# Altium PCB Flyback SMPS.PcbDoc
Units mm, origin at the board's own origin, x right, y up, seen from the top; angles counter-clockwise.
Board outline 76 x 51.5 mm, 2 copper layers (Top Layer, Bottom Layer), stack 1.6 mm thick; 28 components, 19 nets, 79 pads, 10 vias.
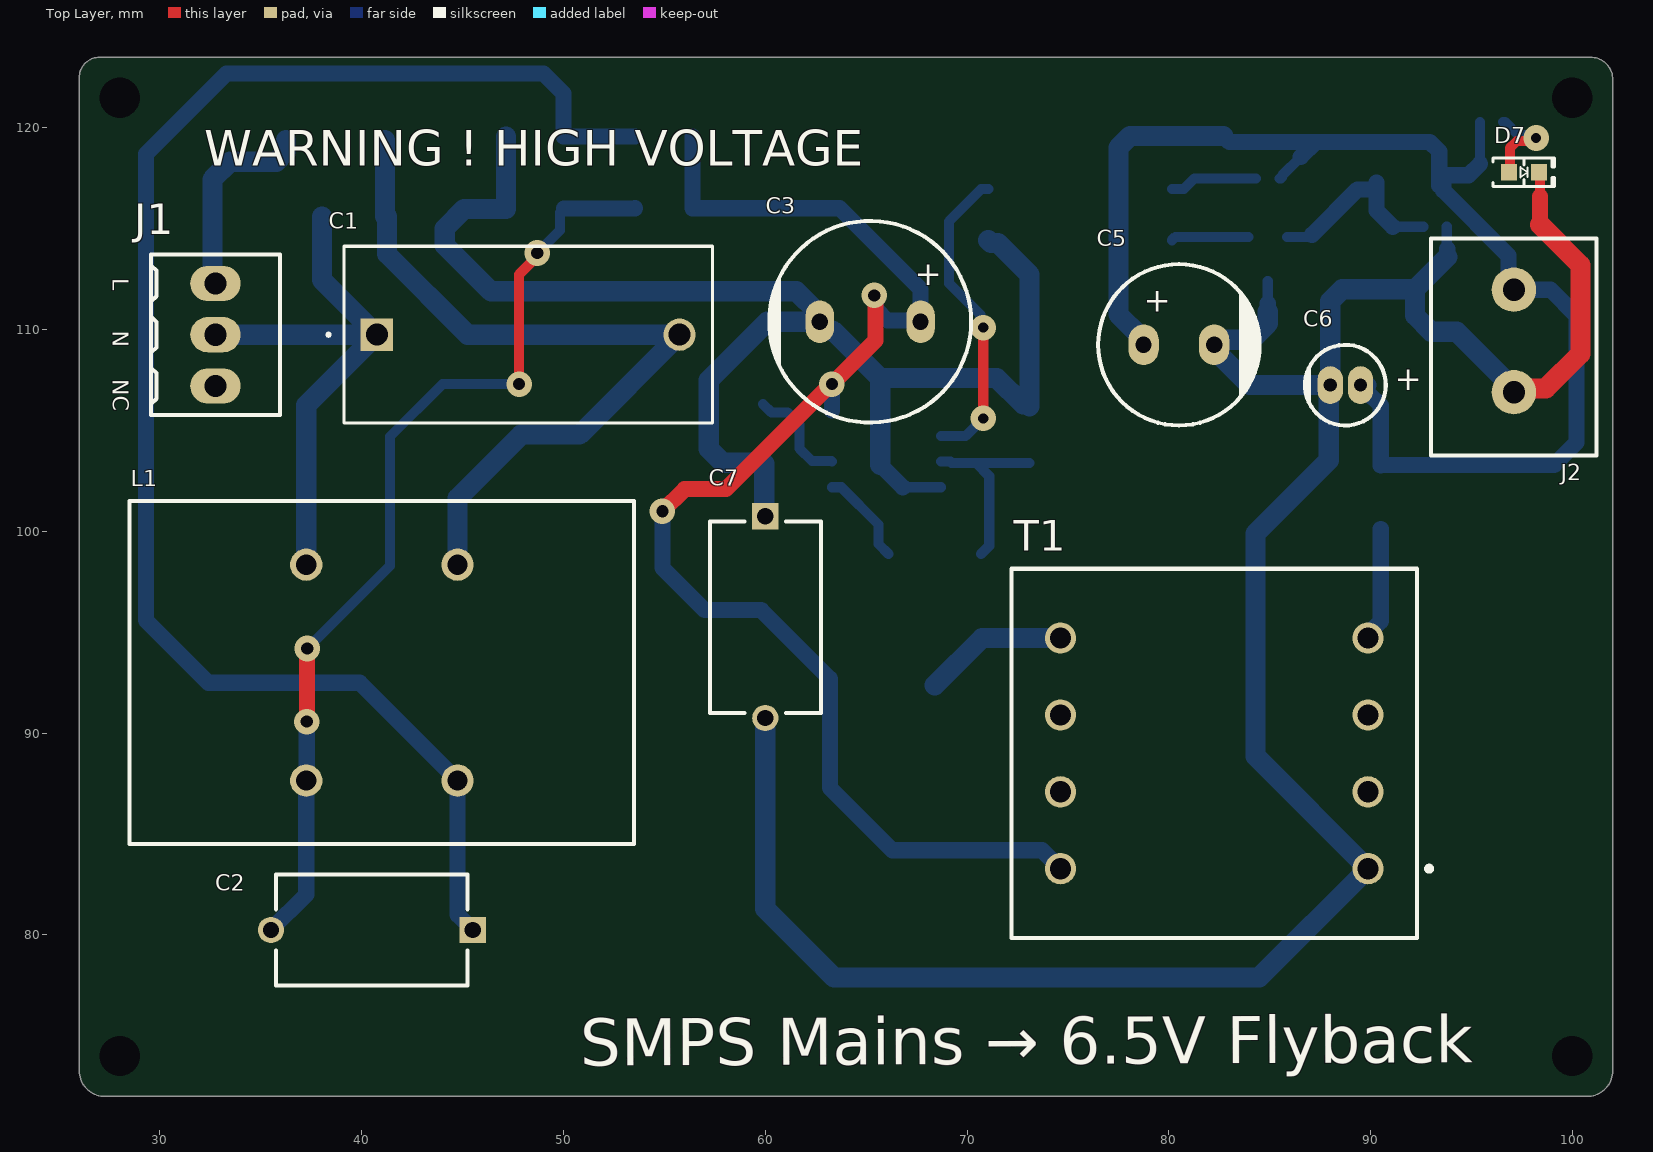
[diagram p0: Top Layer view]
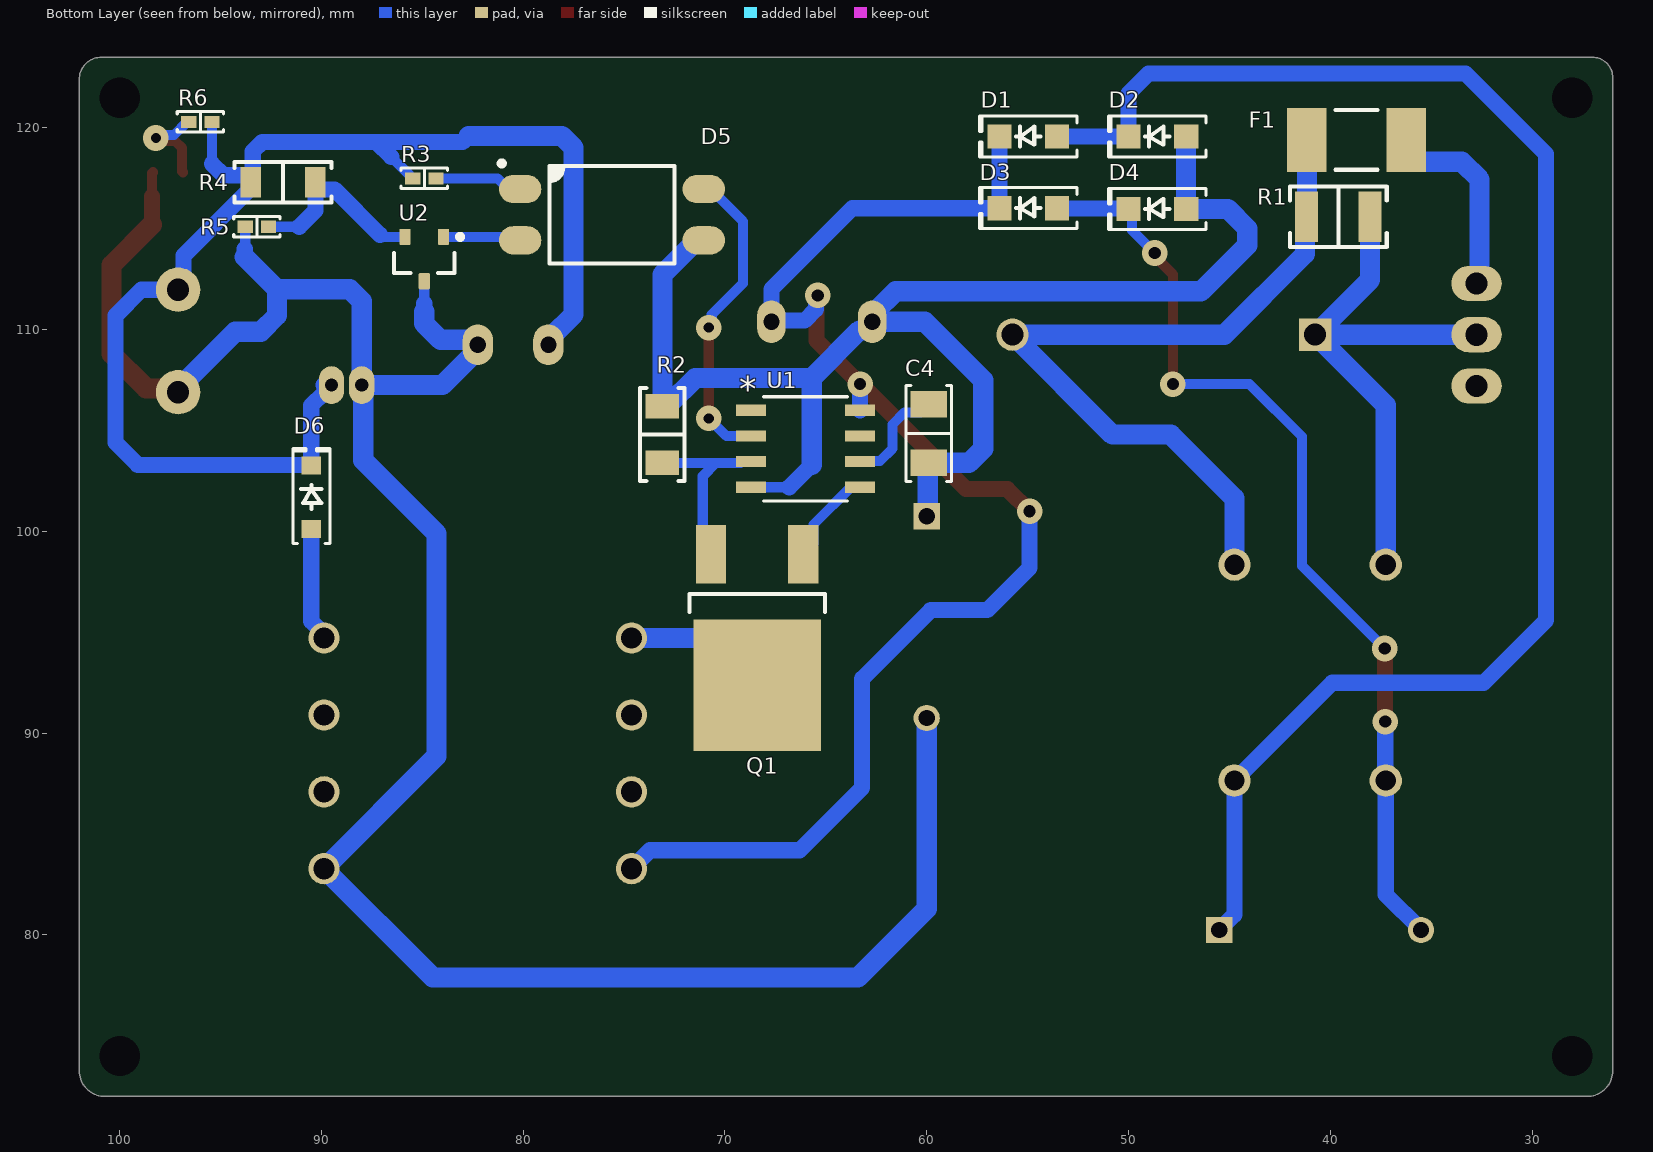
[diagram p1: Bottom Layer view, seen from below]

## Layer stack, top to bottom
Top Solder: solder mask 0.0203, Solder Resist, Dk 3.5
Top Layer: signal copper 0.0508
Dielectric 1: dielectric 1.4986, FR-4, Dk 4.8
Bottom Layer: signal copper 0.0508
Bottom Solder: solder mask 0.0203, Solder Resist, Dk 3.5

## Board outline
26,73.27 26,122.5 cw(c27,122.5) 27,123.5 100.9,123.5 cw(c100.9,122.4) 102,122.4 102,73.27 cw(c100.73,73.27) 100.73,72 27.27,72 cw(c27.27,73.27)

## Design rules (kind name [scope] priority, off if disabled: settings)
BoardOutlineClearance [All] p1: gap=0.2 ignorepadtopadclearanceinfootprint=FALSE
Clearance [All] p1: gap=0.127 ignorepadtopadclearanceinfootprint=TRUE except(0.254: Arc-Hole Track-Hole SMDPad-Hole THPad-Hole Via-Hole Fill-Hole Poly-Hole Region-Hole Text-Hole)
ComponentClearance [All] p1: gap=0.127 collisioncheckmode=3 verticalgap=0.127 showdistances=TRUE
DiffPairsRouting [All] p1: maxlimit=0.254 minlimit=0.127 mostfreqgap=0.127 toplayer_minwidth=0.127 toplayer_maxwidth=25.4 toplayer_prefwidth=0.127 bottomlayer_minwidth=0.127 bottomlayer_maxwidth=25.4 bottomlayer_prefwidth=0.127 maxuncoupledlength=12.7
Height [All] p1: minheight=0 maxheight=1816.048 prefheight=12.7
HoleSize [All] p1: absolutevalues=TRUE maxlimit=6.3 minlimit=0.3 maxpercent=80.000 minpercent=20.000
HoleToHoleClearance [All] p1: gap=0.254 allowstackedmicrovias=FALSE
MinimumAnnularRing [All] p1: minimumring=0.152
MinimumSolderMaskSliver [All] p1: minsoldermaskwidth=0.152
PlaneClearance [All] p1: clearance=0.127
PlaneConnect PlaneConnectPowerPads [InPadClass('PowerPads')] p1: planeconnectstyle=Direct reliefexpansion=0.508 reliefentries=4 reliefconductorwidth=0.254 reliefairgap=0.254
PlaneConnect [All] p2: pad.planeconnectstyle=Relief pad.reliefexpansion=0.3 pad.reliefentries=4 pad.reliefconductorwidth=0.127 pad.reliefairgap=0.127 via.planeconnectstyle=Direct via.reliefexpansion=0.3 via.reliefentries=4 via.reliefconductorwidth=0.127 via.reliefairgap=0.127
PolygonConnect PolygonConnectPowerPads [All vs (InPadClass('PowerPads'))] p1: connectstyle=Direct reliefconductorwidth=0.254 reliefentries=4 polygonreliefangle="90 Angle" airgapwidth=0.254
PolygonConnect [All] p2: thpad.connectstyle=Relief thpad.reliefconductorwidth=0.127 thpad.reliefentries=4 thpad.polygonreliefangle="90 Angle" thpad.airgapwidth=0.127 smdpad.connectstyle=Relief smdpad.reliefconductorwidth=0.127 smdpad.reliefentries=4 smdpad.polygonreliefangle="90 Angle" smdpad.airgapwidth=0.127 via.connectstyle=Direct via.reliefconductorwidth=0.127 via.reliefentries=4 via.polygonreliefangle="90 Angle" via.airgapwidth=0.127
RoutingVias [All] p1: holewidth=0.3 width=0.6 viastyle="Through Hole" minholewidth=0.3 minwidth=0.6 maxholewidth=0.6 maxwidth=6.6
SilkToSilkClearance [All] p1: silktosilkclearance=0.127
SilkToSolderMaskClearance [IsPad] p1: minsilkscreentomaskgap=0.127 clearancetoexposedcopper=TRUE
SolderMaskExpansion [All] p1: expansion=0.051 istentingtop=FALSE
SupplyNets "Schematic Supply Nets_4" [InNet('N')] p1: voltage=0.000
SupplyNets "Schematic Supply Nets_3" [InNet('GND')] p2: voltage=0.000
SupplyNets "Schematic Supply Nets_2" [InNet('GND_SEC')] p3: voltage=0.000
SupplyNets "Schematic Supply Nets_1" [InNet('L')] p4: voltage=0.000
SupplyNets "Schematic Supply Nets" [InNet('+6.5V')] p5: voltage=0.000
UnRoutedNet [All] p1: checkbadconnections=TRUE
Width Width_10mil [All] p1: maxlimit=25.4 minlimit=0.254 preferedwidth=0.254 minimp=50.000000 maximp=50.000000 favimp=50.000000
Width Width_6mil [All] p2: maxlimit=25.4 minlimit=0.152 preferedwidth=0.152 minimp=50.000000 maximp=50.000000 favimp=50.000000
Width Power_20mil [All] p3: maxlimit=25.4 minlimit=0.508 preferedwidth=0.508 minimp=50.000000 maximp=50.000000 favimp=50.000000
Width Power_12mil [All] p4: maxlimit=25.4 minlimit=0.305 preferedwidth=0.305 minimp=50.000000 maximp=50.000000 favimp=50.000000
Width Width_5mil [All] p5: maxlimit=25.4 minlimit=0.127 preferedwidth=0.127 minimp=50.000000 maximp=50.000000 favimp=50.000000
19 further rules are at their usual default settings.

## Components (designator, comment, footprint, x,y, rotation, side; value= is the part's Value field where it differs from the comment)
C1 "100nF" CAP_B32652A--15--8.5x14.5x18_TDK 40.75,109.75 r0 top
C2 "YCAP" Vishay_0_MFG 40.5,80.25 r180 top value=2.2nF
C3 "10uF 400V" "CAP TH ALUM ELEC D10.00mm S5.00mm H17.50mm" 65.2,110.392 r0 top value=10µF
C4 "10µF" "CAP 1206_3216 - 1.8MM" 59.9,104.85 r270 bottom
C5 "470 µF" "CAP AL TH D8 L3.5 H12.5" 80.5,109.25 r0 top
C6 "4.7µF" "CAP TH ALUM ELEC D4.00mm S1.50mm H6.00mm" 88.75,107.25 r0 top
C7 "YCAP" Vishay_0_MFG 60,95.75 r270 top value=2.2nF
D1 "1N4007" SOD123F 54.97,119.566 r0 bottom
D2 "1N4007" SOD123F 48.572,119.566 r0 bottom
D3 "1N4007" SOD123F 54.97,116.019 r0 bottom
D4 "1N4007" SOD123F 48.572,115.984 r0 bottom
D5 "LTV-817S-TA1" "LITEON LTV-817" 75.6,115.7 r180 bottom
D6 "1N5819" SOD-123 90.5,101.7 r90 bottom
D7 "Green" "LED 0603_1608 GREEN" 97.6,117.8 r0 top
F1 "0679H2000-05" "FUSE 2410_6125 2" 38.7,119.4 r0 bottom
J1 "Part Number" "TE 282834-3" 32.75,109.75 r90 top
J2 "282837-2" "TE 282837-2" 97.1,109.44 r270 top
L1 "744823305" WE-CMB-M 41,93 r180 top
Q1 "STD1NK60T4" STMicroelectronics_DPAK_TO-252_-0068772_MFG 68.4,93.8 r0 bottom
R1 "1 MOhms" "RES 1210_3225" 39.6,115.6 r0 bottom
R2 "2.8 Ohms" "RES 1206_3216" 73.1,104.8 r270 bottom
R3 "1 kOhms" "RES 0402_1005" 84.9,117.5 r0 bottom
R4 "220 Ohms" "YAGEO RES 1206_3216" 91.9,117.3 r0 bottom value="3.57 kOhms"
R5 "2.2 kOhms" "RES 0402_1005" 93.2,115.1 r180 bottom
R6 "1 kOhms" "RES 0402_1005" 96,120.3 r180 bottom
T1 "Y8844-AL" COIL-Y8844-AL-8_V 82.25,89 r180 top
U1 "NCP1200" SOIC8_ONS 66.005,104.095 r180 bottom
U2 "TL431AQDBZRQ1" DBZ0003A_L 84.9,113.5 r270 bottom

## Footprints (in the part's own frame and the unit in brackets; to place one, negate y for a bottom-side part, rotate by r counter-clockwise, add the part's x,y. Pads: shape width x height; smd on the part's side, far side on the other; paste and mask are expansions set on the pad)
"CAP 1206_3216 - 1.8MM" [mm] "Chip Capacitor, 2-Leads, Body 3.25x1.60mm, IPC Medium Density"
  rect 1.3x1.8 smd: 1(-1.45,0) 2(1.45,0)
  silkscreen extent -2.37,-1.12 2.37,1.12, body extent -1.6,-0.8 1.6,0.8, height 1.8
"CAP AL TH D8 L3.5 H12.5" [mm] "8MM Diameter, 3.5MM Lead Spacing Aluminium Capacitor"
  oval 1.5x2 hole 0.8: 1(-1.75,0) 2(1.75,0)
  silkscreen extent -4,-4 4,4, body extent -4,-4 4,4, height 11.5
"CAP TH ALUM ELEC D4.00mm S1.50mm H6.00mm" [mm] "4mm Diameter 1.5mm Lead Spacing Aluminum Electrolytic Capacitors Radial, Can"
  oval 1.25x1.875 hole 0.65: 1(0.75,0) 2(-0.75,0)
  silkscreen extent -2,-2 2,2, body extent -2.01,-2 2,2, height 6
"CAP TH ALUM ELEC D10.00mm S5.00mm H17.50mm" [mm] "10mm Diameter 5mm Lead Spacing Aluminum Electrolytic Capacitors Radial, Can"
  oval 1.4x2.1 hole 0.8: 1(2.5,0) 2(-2.5,0)
  silkscreen extent -5,-5 5,5, body extent -5.01,-5 5,5, height 17.5
CAP_B32652A--15--8.5x14.5x18_TDK [mil]
  rect 63x63 / inner round 60 / far side rect 63x63 hole 43 paste-99999 mask+0: 1(0,0)
  round 63 / inner round 60 / far side round 63 hole 43 paste-99999 mask+0: 2(590.55,0)
  silkscreen extent -97,-172 655,172, body extent -76,-167 633,167, height 491
COIL-Y8844-AL-8_V [mm] "Hand Drawn, 8-Leads, Body 18.3x20.1mm"
  round 1.55 hole 1.05: 1(-7.62,5.715) 2(-7.62,1.905) 3(-7.62,-1.905) 4(-7.62,-5.715) 5(7.62,-5.715) 6(7.62,-1.905) 7(7.62,1.905) 8(7.62,5.715)
  silkscreen extent -10.78,-9.15 10.05,9.15, body extent -10.05,-9.15 10.05,9.15, height 14
DBZ0003A_L [mm] "SOT23, 3-Leads, Body 3.04x1.4mm, Pitch 0.95mm, IPC High Density"
  rrect18% 0.8x0.55 smd: 1(-1.1,0.95) 2(-1.1,-0.95) 3(1.1,0)
  silkscreen extent -1.22,-1.5 0.7,1.9, body extent -1.26,-1.46 1.26,1.46, height 0.96
"FUSE 2410_6125 2" [mm]
  rect 1.96x3.15 smd: 1(-2.455,0) 2(2.455,0)
  silkscreen extent -1.05,-1.47 1.05,1.48, body extent -3.17,-1.4 3.17,1.4, height 2.79
"LED 0603_1608 GREEN" [mm] "Chip Diode, 2-Leads, Body 1.60x0.80mm, IPC Medium Density"
  rect 0.8x0.8 smd: 1(-0.75,0) 2(0.75,0)
  silkscreen extent -1.52,-0.7 1.52,0.7, body extent -0.8,-0.4 0.8,0.4, height 0.53
"LITEON LTV-817" [mm] "SOP, 4-Leads, Body 4.60x6.50mm, Pitch 2.54mm, IPC Medium Density"
  oval 2.1x1.4 smd: 1(-4.55,1.27) 2(-4.55,-1.27) 3(4.55,-1.27) 4(4.55,1.27)
  silkscreen extent -5.59,-2.41 3.1,2.66, body extent -5.1,-2.3 5.1,2.3, height 3.85
"RES 0402_1005" [mm] "Chip Resistor, 2-Leads, Body 1.0x0.5mm, IPC Medium Density"
  rect 0.75x0.6 smd: 1(-0.575,0) 2(0.575,0)
  silkscreen extent -1.14,-0.51 1.14,0.51, body extent -0.5,-0.25 0.5,0.25, height 0.35
"RES 1206_3216" [mm] "Chip Resistor, 2-Leads, Body 3.13x1.55mm, IPC Medium Density"
  rect 1.2x1.65 smd: 1(-1.4,0) 2(1.4,0)
  silkscreen extent -2.3,-1.1 2.3,1.1, body extent -1.6,-0.8 1.6,0.8, height 0.6
"RES 1210_3225" [mm] "Chip Resistor, 2-Leads, Body 3.1x2.6mm, IPC Medium Density"
  rect 1.15x2.5 smd: 1(-1.575,0) 2(1.575,0)
  silkscreen extent -2.4,-1.5 2.4,1.5, body extent -1.6,-1.25 1.6,1.25, height 0.7
SOD123F [mm] "SODFL, 2-Leads, Body 1.60x3.50mm, IPC Medium Density"
  rect 1.2x1.2 smd: 1(-1.43,0) 2(1.43,0)
  silkscreen extent -2.41,-1.02 2.41,1.02, body extent -1.75,-0.8 1.75,0.8, height 1.1
SOD-123 [mm] "SOD, 2-Leads, Body 1.55x3.70mm, IPC Medium Density"
  rect 0.9x0.95 smd: 1(-1.575,0) 2(1.575,0)
  silkscreen extent -2.3,-0.92 2.41,0.92, body extent -1.86,-0.78 1.86,0.77, height 1.35
SOIC8_ONS [mil]
  rect 59x22 smd paste+0 mask+0: 1(-106.5,75) 2(-106.5,25) 3(-106.5,-25) 4(-106.5,-75) 5(106.5,-75) 6(106.5,-25) 7(106.5,25) 8(106.5,75)
  silkscreen extent -82,-101 82,102, body extent -122,-96 122,96, height 69
STMicroelectronics_DPAK_TO-252_-0068772_MFG [mm]
  rect 1.5x2.9 smd paste+0 mask+0: 1(-2.285,-5.075) 3(2.285,-5.075)
  rect 6.3x6.5 smd paste+0 mask+0: 4(0,1.425)
  silkscreen extent -3.35,-3.1 3.35,-2.2, body extent -3.24,-5.84 3.3,4.1, height 2.41
"TE 282834-3" [mm]
  oval 1.75x2.5 hole 1.1: 1(-2.54,0) 2(0,0) 3(2.54,0)
  silkscreen extent -3.97,-3.2 3.97,3.2, body extent -4.04,-3.25 4.04,3.25, height 10
"TE 282837-2" [mm] "Wire to Board Terminal Block Horizontal with Board, 2 Postions, Body 10.76x8.2 mm, Pitch 5.08mm"
  round 2.2 hole 1.1: 1(-2.54,0) 2(2.54,0)
  silkscreen extent -5.08,-4.1 5.68,4.1, body extent -5.08,-4.1 5.68,4.1, height 10.3
Vishay_0_MFG [mm]
  rect 1.3x1.3 hole 0.8 paste-2539.97 mask+0: 1(-5,0)
  round 1.3 hole 0.8 paste-2539.97 mask+0: 2(5,0)
  silkscreen extent -4.75,-2.75 4.75,2.75, body extent -5.75,-2.85 5.75,2.85, height 0.25
WE-CMB-M [mm] "THT Inductor, 4-Leads, Body 25.0 x 17.0 mm"
  round 1.6 hole 1: 1(-3.75,-5.35) 2(-3.75,5.35) 3(3.75,5.35) 4(3.75,-5.35)
  silkscreen extent -12.5,-8.5 12.5,8.5, body extent -11.05,-8.5 11.05,8.5, height 26.51
"YAGEO RES 1206_3216" [mm] "Chip Resistor, 2-Leads, Body 3.13x1.55mm"
  rect 1x1.5 smd: 1(-1.6,0) 2(1.6,0)
  silkscreen extent -2.4,-1 2.4,1, body extent -1.6,-0.8 1.6,0.8, height 0.6

## Part data
C1: library part B32652A1103J000, "No Description Available", Manufacturer_Name=TDK, Copyright="Copyright (C) 2025 Ultra Librarian. All rights reserved.", Manufacturer_Part_Number=B32652A1103J000
C2 C7: library part CMP-001-00084-1, "2200 pF ±20% 500VAC Ceramic Capacitor Y5V (F) Radial, Disc", Case/Package=0, Digikey Part Number=BC3303-ND, manufacturer=Vishay, Mouser Part Number=72-VY1222M37Y5VQ63V0, Part Number=VY1222M37Y5VQ63V0, Temperature="-40°C to +125°C", Temperature Characteristic=Y5V, Temperature Range High=125°C, Temperature Range Low=-40°C, Tolerance=20%, Vac X Rating=X1, Vac Y Rating=Y1, Voltage Ac Rating X=760V, Voltage Ac Rating Y=500V, Voltage Rating=1.5kV, Automotive=No, componentlink1description=Upverter, componentlink1url=https://upverter.com/part/id/97ca20b8586b3509/, componentlink2description=Datasheet, componentlink2url=https://www.vishay.com/docs/28537/vy1series.pdf, Datasheet Path=datasheets/Cap_Vishay_VY1222M37Y5VQ63V0_eec.pdf, Digikey Description="CAP CER 2200PF 500VAC Y5V RADIAL", Height=24.5mm, helpURL=https://upverter.com/part/id/97ca20b8586b3509/, Lead Free=Yes, Material=Ceramic, Mouser Description="VY1 Ceramic Capacitor 2 2NF 20% Y5V", RoHS=TRUE, Symbol Hash=02cd4be3c70576c341d710602a673aaf100b1e689dd796f6d4934cc5521dd216, Verification Version=0.0.0.3
C3: library part 860241375002, "CAP 10 UF 20% 400 V", Capacitance=10µF, Device Package="Radial, Can", Lifetime @ Temp.="10000 Hrs @ 105°C", manufacturer="Würth Elektronik", Operating Temperature="-25°C ~ 105°C", Ripple Current @ High Frequency="274mA @ 100kHz", Ripple Current @ Low Frequency="137mA @ 120Hz", Supplier Part Number 1=732-9301-1-ND, Tolerance=±20%, Voltage - Rated=400V, Applications="General Purpose", componentlink1description=Datasheet, componentlink1url=https://katalog.we-online.de/pbs/datasheet/860241375002.pdf, componentlink2description="DigiKey Link", componentlink2url=http://digikey.com/product-detail/en/w-rth-elektronik/860241375002/732-9301-1-ND/5729239, Height - Seated (Max)="0.689\" (17.50mm)", lastupdated="9/2/2020 1:31:25 AM", Lead Spacing="0.197\" (5.00mm)", Lifecycle Status=Active, Minimum Order=1, Mounting Type="Through Hole", Package / Case="Radial, Can", packaging=TapeAndBox, Part Number=860241375002, Part Status=Active, partid=12069, Polarization=Polar, price=0.48, series=WCAP-AT1H, Size / Dimension="0.394\" Dia (10.00mm)", Supplier 1=DigiKey
C4: library part 12065D106KAT2A, "CAP CER 10UF 50V X5R 1206", Device Package="1206 (3216 Metric)", manufacturer="AVX Corporation", Operating Temperature="-55°C ~ 85°C", Supplier Part Number 1=478-9979-1-ND, Temperature Coefficient=X5R, Tolerance=±10%, Voltage - Rated=50V, Applications="General Purpose", Capacitance=10µF, componentlink1description=Datasheet, componentlink1url=http://datasheets.avx.com/cx5r.pdf, componentlink2description="DigiKey Link", componentlink2url=http://digikey.com/product-detail/en/avx-corporation/12065D106KAT2A/478-9979-1-ND/6149060, lastupdated="9/2/2020 1:05:35 AM", Lifecycle Status=Active, Minimum Order=1, Mounting Type="Surface Mount, MLCC", Package / Case="1206 (3216 Metric)", packaging=TapeAndReel, Part Number=12065D106KAT2A, Part Status=Active, partid=21345, price=0.16, series=-, Size / Dimension="0.126\" L x 0.063\" W (3.20mm x 1.60mm)", Supplier 1=DigiKey, Thickness (Max)="0.071\" (1.80mm)"
C5: library part UKW1C471MPD1TD, "CAP ALUM 470UF 20% 16V RADIAL", Device Package="Radial, Can", Lifetime @ Temp.="2000 Hrs @ 85°C", manufacturer=Nichicon, Operating Temperature="-40°C ~ 85°C", Ripple Current @ Low Frequency="420 mA @ 120 Hz", Supplier Part Number 1=493-10758-1-ND, Tolerance=±20%, Voltage - Rated="16 V", Applications=Audio, Capacitance="470 µF", componentlink1description=Datasheet, componentlink1url=http://nichicon-us.com/english/products/pdfs/e-ukw.pdf, componentlink2description="DigiKey Link", componentlink2url=https://www.digikey.com/en/products/detail/nichicon/UKW1C471MPD1TD/4317336, Height - Seated (Max)="0.492\" (12.50mm)", lastupdated="6/3/2024 8:06:12 PM", Lead Spacing="0.138\" (3.50mm)", Lifecycle Status=Active, Minimum Order=1, Mounting Type="Through Hole", Package / Case="Radial, Can", packaging=TapeAndBox, Part Number=UKW1C471MPD1TD, Part Status=Active, partid=7216, Polarization=Polar, price=0.23, series=UKW, Size / Dimension="0.315\" Dia (8.00mm)", Supplier 1=DigiKey
C6: library part UMP1C4R7MDD1TP, "CAP ALUM 4.7UF 20% 16V RADIAL", Device Package="Radial, Can", Lifetime @ Temp.="2000 Hrs @ 85°C", manufacturer=Nichicon, Operating Temperature="-40°C ~ 85°C", Ripple Current @ High Frequency="18mA @ 10kHz", Ripple Current @ Low Frequency="12mA @ 120Hz", Supplier Part Number 1=493-10248-1-ND, Tolerance=±20%, Voltage - Rated=16V, Applications="General Purpose", Capacitance=4.7µF, componentlink1description=Datasheet, componentlink1url=http://nichicon-us.com/english/products/pdfs/e-ump.pdf, componentlink2description="DigiKey Link", componentlink2url=http://digikey.com/product-detail/en/nichicon/UMP1C4R7MDD1TP/493-10248-1-ND/4312507, Height - Seated (Max)="0.236\" (6.00mm)", lastupdated="9/6/2020 1:48:30 AM", Lead Spacing="0.059\" (1.50mm)", Lifecycle Status=Active, Minimum Order=1, Mounting Type="Through Hole", Package / Case="Radial, Can", packaging=TapeAndBox, Part Number=UMP1C4R7MDD1TP, Part Status=Active, partid=23164, Polarization=Bi-Polar, price=0.11, series=UMP, Size / Dimension="0.157\" Dia (4.00mm)", Supplier 1=DigiKey
D1 D2 D3 D4: library part 1N4007FLTR, "STANDARD RECTIFIER 1000V SOD-123", Capacitance @ Vr, F="15pF @ 4V, 1MHz", Current - Average Rectified (Io)=1A, Current - Reverse Leakage @ Vr="5µA @ 1000V", manufacturer="SMC Diode Solutions", Package / Case=SOD-123F, Supplier Device Package=SOD-123FL, Supplier Part Number 1=1655-1N4007FLCT-ND, Voltage - DC Reverse (Vr) (Max)=1000V, Voltage - Forward (Vf) (Max) @ If="1.1V @ 1A", componentlink1description=Datasheet, componentlink1url=http://www.smc-diodes.com/propdf/1N4001FL-1N4007FL%20N1646%20REV.A.pdf, componentlink2description="DigiKey Link", componentlink2url=http://digikey.com/product-detail/en/smc-diode-solutions/1N4007FLTR/1655-1N4007FLCT-ND/11657827, Diode Type=Standard, lastupdated="8/30/2020 8:59:55 PM", Lifecycle Status=Active, Minimum Order=1, Mounting Type="Surface Mount", packaging=TapeAndReel, Part Number=1N4007FLTR, partid=3314, price=0.01, Speed="Standard Recovery >500ns, > 200mA (Io)", Supplier 1=DigiKey
D5: "OPTOISOLATR 5KV TRANSISTOR 4-SMD", Current - DC Forward (If) (Max)=50mA, Current Transfer Ratio (Max)="600% @ 5mA", Current Transfer Ratio (Min)="50% @ 5mA", Device Package="4-SMD, Gull Wing", manufacturer="Lite-On Inc.", Operating Temperature="-30°C ~ 110°C", Supplier Device Package=4-SMD, Supplier Part Number 1=160-1893-1-ND, Voltage - Forward (Vf) (Typ)=1.2V, Voltage - Isolation=5000Vrms, Voltage - Output (Max)=35V, componentlink1description=Datasheet, componentlink1url=http://optoelectronics.liteon.com/upload/download/DS-70-96-0016/LTV-8X7%20series%20201610%20.pdf, componentlink2description="DigiKey Link", componentlink2url=http://digikey.com/product-detail/en/lite-on-inc/LTV-817S-TA1/160-1893-1-ND/3306757, Current - Output / Channel=50mA, Input Type=DC, lastupdated="1/12/2020 9:58:48 PM", Lifecycle Status=Active, Minimum Order=1, Mounting Type="Surface Mount", Number of Channels=1, Output Type=Transistor, Package / Case="4-SMD, Gull Wing", packaging=TapeAndReel, Part Number=LTV-817S-TA1, Part Status=Active, price=0.12, Rise / Fall Time (Typ)="4µs, 3µs", series=-, Supplier 1=DigiKey, Vce Saturation (Max)=200mV
D6: library part 1N5819HW-7-F, "DIODE SCHOTTKY 40V 1A SOD123", Capacitance @ Vr, F="60pF @ 4V, 1MHz", Current - Average Rectified (Io)=1A, Current - Reverse Leakage @ Vr="1 mA @ 40 V", manufacturer="Diodes Incorporated", Operating Temperature - Junction="-65°C ~ 125°C", Package / Case=SOD-123, Supplier Part Number 1=1N5819HW-FDICT-ND, Voltage - DC Reverse (Vr) (Max)="40 V", Voltage - Forward (Vf) (Max) @ If="450 mV @ 1 A", componentlink1description=Datasheet, componentlink1url=https://www.diodes.com/assets/Datasheets/ds30217.pdf, componentlink2description="DigiKey Link", componentlink2url=https://www.digikey.com/en/products/detail/diodes-incorporated/1N5819HW-7-F/814970, Diode Type=Schottky, lastupdated="6/3/2024 7:54:46 PM", Lifecycle Status=Active, Minimum Order=1, Mounting Type="Surface Mount", packaging=TapeAndReel, Part Number=1N5819HW-7-F, Part Status=Active, partid=2212, price=0.05, series=-, Speed="Fast Recovery =< 500ns, > 200mA (Io)", Supplier 1=DigiKey, Supplier Device Package=SOD-123
D7: library part "LT Q99G.01-R2T1-25-1", "NEXT GENERATION OF CHIP LED 0603", Current - Test=5mA, Device Package="0603 (1608 Metric)", Lens Color=Colorless, manufacturer="ams-OSRAM USA Inc.", Millicandela Rating=247.5mcd, Supplier Device Package=0603, Supplier Part Number 1=475-LTQ99G.01-R2T1-25-1CT-ND, Voltage - Forward (Vf) (Typ)=2.9V, Color=Green, componentlink2description="DigiKey Link", componentlink2url=https://www.digikey.com/en/products/detail/ams-osram-usa-inc/LT-Q99G-01-R2T1-25-1/21556499, Height (Max)=0.75mm, lastupdated="8/25/2025 8:35:06 PM", Lens Size="1.10mm x 0.80mm", Lens Style="Rectangle with Flat Top", Lens Transparency=Clear, Lifecycle Status=Active, Minimum Order=1, Mounting Type="Surface Mount", Package / Case="0603 (1608 Metric)", packaging=TapeAndReel, Part Number="LT Q99G.01-R2T1-25-1", partid=1419, price=0.03, series="Chip LED 0603", Size / Dimension="1.60mm L x 0.80mm W", Supplier 1=DigiKey, Viewing Angle=140°, Wavelength - Dominant=530nm, Wavelength - Peak=518nm
F1: "FUSE BOARD MNT 2A 350VAC 72VDC", Breaking Capacity @ Rated Voltage="50A AC, 100A DC", Current Rating (Amps)=2A, manufacturer="Bel Fuse Inc.", Operating Temperature="-55°C ~ 125°C", Package / Case="2-SMD, Square End Block", Supplier Part Number 1=507-2049-1-ND, Voltage Rating - AC=350V, Voltage Rating - DC=72V, Approval Agency=cURus, Approvals=cURus, componentlink1description=Datasheet, componentlink1url=https://www.belfuse.com/resources/CircuitProtection/datasheets/0679H%20Jan%202017.pdf, componentlink2description="DigiKey Link", componentlink2url=http://digikey.com/product-detail/en/bel-fuse-inc/0679H2000-05/507-2049-1-ND/6139813, Fuse Type="Board Mount (Cartridge Style Excluded)", lastupdated="6/3/2024 8:26:42 PM", Lifecycle Status=Active, Melting I²t=0.68, Minimum Order=1, Mounting Type="Surface Mount", packaging=TapeAndReel, Part Number=0679H2000-05, Part Status=Active, price=0.14, Response Time="Fast Blow", series=0679H, Size / Dimension="0.240\" L x 0.100\" W x 0.110\" H (6.10mm x 2.54mm x 2.79mm)", Supplier 1=DigiKey
J1: library part 282834-3, "TERM BLK 3P SIDE ENT 2.54MM PCB", Color=Green, Current=10A, manufacturer="TE Connectivity AMP Connectors", Supplier Part Number 1=A98334-ND, Voltage=150V, componentlink1description=Datasheet, componentlink1url=https://www.te.com/commerce/DocumentDelivery/DDEController?Action=srchrtrv&DocNm=282834&DocType=Customer+Drawing&DocLang=English, componentlink2description="DigiKey Link", componentlink2url=http://digikey.com/product-detail/en/te-connectivity-amp-connectors/282834-3/A98334-ND/1153264, lastupdated="1/15/2020 4:15:50 AM", Lifecycle Status=Active, Mating Orientation="Horizontal with Board", Minimum Order=1, Mounting Type="Through Hole", Number of Levels=1, packaging=Bulk, Part Number=282834-3, Part Status=Active, Pitch="0.100\" (2.54mm)", Positions Per Level=3, price=2.01, series=Buchanan, Supplier 1=DigiKey, Wire Gauge="16-30 AWG", Wire Termination="Screw - Rising Cage Clamp"
J2: "TERM BLK 2P SIDE ENT 5.08MM PCB", Color=Green, Current="13.5 A", manufacturer="TE Connectivity AMP Connectors", Supplier Part Number 1=A113320-ND, Voltage="300 V", componentlink1description=Datasheet, componentlink1url=https://www.te.com/commerce/DocumentDelivery/DDEController?Action=srchrtrv&DocNm=282837&DocType=Customer+Drawing&DocLang=English, componentlink2description="DigiKey Link", componentlink2url=https://www.digikey.com/en/products/detail/te-connectivity-amp-connectors/282837-2/2187973, Features="Interlocking (Side)", lastupdated="6/21/2022 3:00:23 PM", Lifecycle Status=Active, Mating Orientation="Horizontal with Board", Minimum Order=1, Mounting Type="Through Hole", Number of Levels=1, packaging=Tray, Part Number=282837-2, Part Status=Active, Pitch="0.200\" (5.08mm)", Positions Per Level=2, price=0.31, series=Buchanan, Supplier 1=DigiKey, Wire Gauge="16-28 AWG", Wire Termination="Screw - Rising Cage Clamp"
L1: "THT Common Mode Power Line Choke WE-CMB, L = 5.00 mH", Inductance="5.00 mH", componentlink1description="Manufacturer Link", componentlink1url=http://www.we-online.com, componentlink2description=Datasheet, componentlink2url=http://www.we-online.de/katalog/media/pdf/744823305.pdf, DatasheetVersion="ver 7, Nov-2006", PackageDescription="THT Inductor, 4-Leads, Body 25.0 x 17.0 mm", PackageReference=WE-CMB-M, PackageVersion=2006, PartNumber=744823305
Q1: library part CMP-007-000000-1, "N-Channel 600V 1A (Tc) 30W (Tc) Surface Mount DPAK", Continuous Drain Current=1A, Digikey Part Number=497-2483-1-ND, Drain To Source Breakdown Voltage=600V, Drain To Source Resistance=7.3Ω, Gate To Source Voltage=30V, Input Capacitace At Vds="156pF @ 25V", manufacturer=STMicroelectronics, Max Forward Diode Voltage=1.6V, Max Junction Temp=+150°C, Mouser Part Number=511-STD1NK60, Package=DPAK(TO-252)-0068772, Power Dissipation=30W, Pulse Drain Current=4A, Temperature="-55°C to +150°C", Temperature Range High=150°C, Temperature Range Low=-55°C, Automotive=No, componentlink1description=Upverter, componentlink1url=https://upverter.com/part/id/826df9c6efb694a8/, componentlink2description=Datasheet, componentlink2url=https://www.st.com/resource/en/datasheet/std1nk60t4.pdf, Datasheet Path=datasheets/Trans_STMicroelectronics_STD1NK60T4_eec.pdf, Depletion Mode=False, Digikey Description="MOSFET N-CH 600V 1A DPAK", Drain To Source Voltage=600V, Gate Charge At Vgs="7nC @ 10V", Height=2.63mm, helpURL=https://upverter.com/part/id/826df9c6efb694a8/, Lead Free=Yes, Mouser Description="MOSFET N-Ch 600 Volt 1.0Amp Zener SuperMESH", Number of Channels=1, Number Of N Channels=1, Part Number=STD1NK60T4, Reverse Recovery Charge=240nC, Reverse Recovery Time=140ns, RoHS=TRUE, Rthja Max=100°C/W, Standoff Height=0.03mm, Symbol Hash=86656c45bbbddc162aead764a772c09aa28df33f5023c6f9e1f954939099aa0e, Technology=MOSFET, Threshold Vgs=3V, Threshold Vgs Max=3.7V, Threshold Vgs Min=2.25V, Turn Off Delay Time=19ns, Turn On Delay Time=6.5ns, Verification Version=0.0.0.3
R1: library part CRGP1210F1M0, "RES 1M OHM 1% 3/4W 1210", Device Package="1210 (3225 Metric)", manufacturer="TE Connectivity Passive Product", Operating Temperature="-55°C ~ 155°C", Power (Watts)="0.75W, 3/4W", Supplier Device Package=1210, Supplier Part Number 1=A130635CT-ND, Temperature Coefficient=±100ppm/°C, Tolerance=±1%, componentlink1description=Datasheet, componentlink1url=https://www.te.com/commerce/DocumentDelivery/DDEController?Action=srchrtrv&DocNm=9-1773463-9&DocType=DS&DocLang=English, componentlink2description="DigiKey Link", componentlink2url=https://www.digikey.com/en/products/detail/te-connectivity-passive-product/CRGP1210F1M0/8577237, Composition="Thick Film", Features="Pulse Withstanding", Height - Seated (Max)="0.026\" (0.65mm)", lastupdated="6/3/2024 8:19:02 PM", Lifecycle Status=Active, Minimum Order=1, Number of Terminations=2, Package / Case="1210 (3225 Metric)", packaging=TapeAndReel, Part Number=CRGP1210F1M0, Part Status=Active, price=0.05, Resistance="1 MOhms", series=CRGP, Size / Dimension="0.122\" L x 0.102\" W (3.10mm x 2.60mm)", Supplier 1=DigiKey
R2: library part CPF1206B2R8E1, "CPF 1206 2R8 0.1% 25PPM 1K RL", Device Package="1206 (3216 Metric)", manufacturer="TE Connectivity Passive Product", Operating Temperature="-55°C ~ 155°C", Power (Watts)="0.125W, 1/8W", Supplier Device Package=1206, Supplier Part Number 1=1712-CPF1206B2R8E1CT-ND, Temperature Coefficient=±25ppm/°C, Tolerance=±0.1%, componentlink1description=Datasheet, componentlink1url=https://www.te.com/commerce/DocumentDelivery/DDEController?Action=srchrtrv&DocNm=1773200&DocType=DS&DocLang=English, componentlink2description="DigiKey Link", componentlink2url=https://www.digikey.com/en/products/detail/te-connectivity-passive-product/CPF1206B2R8E1/14006927, Composition="Thin Film", Height - Seated (Max)="0.026\" (0.65mm)", lastupdated="2/9/2024 8:53:26 PM", Lifecycle Status=Active, Minimum Order=1, Number of Terminations=2, Package / Case="1206 (3216 Metric)", packaging=TapeAndReel, Part Number=CPF1206B2R8E1, Part Status=Active, partid=58938, price=0.16, Resistance="2.8 Ohms", series=CPF, Size / Dimension="0.120\" L x 0.061\" W (3.05mm x 1.55mm)", Supplier 1=DigiKey
R3 R6: library part CPF0402B1K0E, "RES SMD 1K OHM 0.1% 1/16W 0402", Device Package="0402 (1005 Metric)", manufacturer="TE Connectivity Passive Product", Operating Temperature="-55°C ~ 155°C", Power (Watts)="0.063W, 1/16W", Supplier Device Package=0402, Supplier Part Number 1=A119928CT-ND, Temperature Coefficient=±25ppm/°C, Tolerance=±0.1%, componentlink1description=Datasheet, componentlink1url=https://www.te.com/commerce/DocumentDelivery/DDEController?Action=srchrtrv&DocNm=1773200&DocType=DS&DocLang=English, componentlink2description="DigiKey Link", componentlink2url=https://www.digikey.com/en/products/detail/te-connectivity-passive-product/CPF0402B1K0E/4966468, Composition="Thin Film", Height - Seated (Max)="0.014\" (0.35mm)", lastupdated="2/9/2024 8:30:24 PM", Lifecycle Status=Active, Minimum Order=1, Number of Terminations=2, Package / Case="0402 (1005 Metric)", packaging=TapeAndReel, Part Number=CPF0402B1K0E, Part Status=Active, partid=2470, price=0.10, Resistance="1 kOhms", series="CPF, Neohm", Size / Dimension="0.039\" L x 0.020\" W (1.00mm x 0.50mm)", Supplier 1=DigiKey
R4: library part RC0402FR-073K57L, "RES 3.57K OHM 1% 1/16W 0402", Device Package="0402 (1005 Metric)", manufacturer=Yageo, Operating Temperature="-55°C ~ 155°C", Power (Watts)="0.063W, 1/16W", Resistance="3.57 kOhms", Supplier Device Package=0402, Supplier Part Number 1=YAG3150CT-ND, Temperature Coefficient=±100ppm/°C, Tolerance=±1%, componentlink1description=Datasheet, componentlink1url=https://www.yageo.com/upload/media/product/productsearch/datasheet/rchip/PYu-RC_Group_51_RoHS_L_10.pdf, componentlink2description="DigiKey Link", componentlink2url=https://www.digikey.com/en/products/detail/yageo/RC0402FR-073K57L/5281010, Composition="Thick Film", Features="Moisture Resistant", Height - Seated (Max)="0.016\" (0.40mm)", lastupdated="8/31/2025 3:04:18 PM", Lifecycle Status=Active, Minimum Order=1, Number of Terminations=2, Package / Case="0402 (1005 Metric)", packaging=CutTape, Part Number=RC0402FR-073K57L, Part Status=Active, partid=2603, price=0.01, series=RC_L, Size / Dimension="0.039\" L x 0.020\" W (1.00mm x 0.50mm)", Supplier 1=DigiKey
R5: library part RR0510P-222-D, "RES SMD 2.2K OHM 0.5% 1/16W 0402", Device Package="0402 (1005 Metric)", manufacturer=Susumu, Operating Temperature="-55°C ~ 125°C", Power (Watts)="0.063W, 1/16W", Supplier Part Number 1=RR05P2.2KDCT-ND, Temperature Coefficient=±25ppm/°C, Tolerance=±0.5%, componentlink1description=Datasheet, componentlink1url=http://www.susumu.co.jp/common/pdf/n_catalog_partition05_en.pdf, componentlink2description="DigiKey Link", componentlink2url=https://www.digikey.com/en/products/detail/susumu/RR0510P-222-D/432405, Composition="Thin Film", Height - Seated (Max)="0.016\" (0.40mm)", lastupdated="2/9/2024 8:30:21 PM", Lifecycle Status=Active, Minimum Order=1, Number of Terminations=2, Package / Case="0402 (1005 Metric)", packaging=TapeAndReel, Part Number=RR0510P-222-D, Part Status=Active, partid=3229, price=0.01, Resistance="2.2 kOhms", series=RR, Size / Dimension="0.039\" L x 0.020\" W (1.00mm x 0.50mm)", Supplier 1=DigiKey
T1: "Flyback Transformer, 3.5 W, -40 to 85 degC, 18.3 x 20.1 x 14 mm Package", Inductance +/-10% (mH)=2.9, Leakage inductance max (uH)=26, manufacturer=Coilcraft, Operating Temperature Range="-40 to 85 degC", Application="3.5 W", componentlink1description="Manufacturer URL", componentlink1url=http://www.coilcraft.com/, componentlink2description=Datasheet, componentlink2url=http://www.coilcraft.com/pdf_viewer/showpdf.cfm?f=pdf_store:y8844.pdf, ComponentLink3Description="Package Specification", ComponentLink3URL=http://www.coilcraft.com/pdf_viewer/showpdf.cfm?f=pdf_store:y8844.pdf, DatasheetVersion=31/01/2005, DCR max (Ohms)="4.25 (8-5) 0.07 (4-1)", Isolation (Vrms)=1500, Mounting Technology="Through Hole", Output="6.5 V, 0.54 A", PackageDescription="8-Pin Through Hole Package, Body 18.3 x 20.1 mm", PackageReference=Y8844-AL-8, PartNumber=Y8844-AL
U1: library part NCP1200AD100R2, "No Description Available", Manufacturer_Name=onsemi, Copyright="Copyright (C) 2025 Ultra Librarian. All rights reserved.", Manufacturer_Part_Number=NCP1200AD100R2, RefDes=RefDes, Type=Type
U2: "Automotive Catalog Adjustable Precision Shunt Regulator, 34 ppm / degC, 100 mA, -40 to 125 degC, 3-pin SOT-23 (DBZ), Green (RoHS & no Sb/Br)", manufacturer="Texas Instruments", Rating=Automotive, Temp Coeff(Typ)(ppm/ degree C)=34, Code_JEDEC=TO-236, componentlink1description="Manufacturer URL", componentlink1url=http://www.ti.com/, componentlink2description=Datasheet, componentlink2url=http://www.ti.com/general/docs/lit/getliterature.tsp?genericPartNumber=TL431A-Q1&fileType=pdf, ComponentLink3Description="Package Specification", ComponentLink3URL=http://www.ti.com/litv/pdf/mpds108a, DatasheetVersion=SGLS302C, Eco-Plan="Green (RoHS & no Sb/Br)", Initial Accuracy @ 25/deg C(%)=1, Iout/Iz(Max)(mA)=100, Min Iz for Regulation(uA)=600, Mounting Technology="Surface Mount", PackageDescription="3-Pin Plastic Small Outline, Body 2.92 x 1.3 mm, Pitch 0.95 mm", PackageReference=DBZ0003A, PackageVersion=4203227/B, PartNumber=TL431AQDBZRQ1, SubFamily="Shunt Voltage Reference", VO Adj(Max)(V)=36, VO Adj(Min)(V)=2.495

## Free pads (board coordinates)
  round 0 hole 2 unplated: 14(28,74) 14(28,121.5) 14(100,74) 14(100,121.5)

## Via types
v1: diameter 1.27, hole 0.6, Top Layer to Bottom Layer, 7 vias
v2: diameter 1.27, hole 0.5, Top Layer to Bottom Layer, 3 vias

## Nets (pads, with @x,y where several pads share a name; then routed paths per layer and width w, separated by ;. In a path a pad name is that pad's centre, name@x,y a point inside that pad or via, vN(x,y) a via of type N, cw(c..) or ccw(c..) an arc to the next point about the centre after c; other vN are vias at no path point)
+6.5V: C5.1 C6.1 D6.2 J2.1 R3.2 R4.2 R6.2 | length 66.4
  Bottom Layer w0.5: R3.2 85.55,117.5 85.6,117.55 85.6,117.625 86.535,118.56 ; 95.425,118.225 R6.2
  Bottom Layer w0.8: 82.7,119.6 83,119.3 87.275,119.3 ; 86.535,118.56 87.275,119.3 ; C6.1 C6.1@89.892,107.25 ; C6.1@89.892,106.851 90.5,106.244 D6.2 90.525,103.3 99.1,103.3 100.2,104.4 100.2,110.7 98.92,111.98 J2.1 96.832,112.248 96.832,113.668 93.6,116.9 93.6,117.2 R4.2 ; R4.2@93.4,117.15 93.4,118.831 92.931,119.3 87.275,119.3 ; R4.2@93.5,117.55 93.6,117.65 94.85,117.65 95.425,118.225
  Bottom Layer w1: C5.1 78.587,109.413 78.587,109.663 77.5,110.75 77.5,119.014 78.086,119.6 82.7,119.6
CS: Q1.3 R2.2 U1.3 | length 9.4
  Bottom Layer w0.5: U1.3 69.18,103.46 69.24,103.4 70.44,103.4 ; Q1.3 71.1,99.29 71.1,102.74 70.44,103.4 ; R2.2 70.44,103.4
FB: D5.4 U1.2 | length 15.5
  Top Layer w0.5: v2(70.8,105.6) v2(70.8,110.1)
  Bottom Layer w0.5: U1.2 69.93,104.73 v2(70.8,105.6) ; v2(70.8,110.1) 70.653,110.247 70.653,110.747 69.1,112.3 69.1,115.37 70.7,116.97 D5.4
GND: C3.2 C4.2 C7.1 D2.1 D4.1 D5.3 R2.1 U1.4 | length 73.1
  Bottom Layer w0.5: 66.81,102.19 U1.4
  Bottom Layer w0.8: 65.7,103.3 66.81,102.19
  Bottom Layer w1: D2.1 D4.1 45.084,115.984 44.114,115.014 44.114,114.186 46.4,111.9 61.542,111.9 62.569,110.873 62.569,110.523 C3.2 60.092,110.392 57.2,107.5 57.2,104.1 57.9,103.4 C4.2 59.95,103.35 59.95,100.8 C7.1 ; C3.2@62.7,110.151 62.885,109.966 63.334,109.966 65.7,107.6 ; 65.7,103.3 65.7,107.6 ; D5.3 71.181,114.299 71.531,114.299 73.1,112.73 R2.1 73,106.3 72.775,106.3 71.475,107.6 65.7,107.6
GND_SEC: C5.2 C6.2 C7.2 D7.2 J2.2 R5.1 T1.1 U2.3 | length 116.9
  Top Layer w0.5: D7.2 98.4,117.75 98.4,116.6
  Top Layer w0.8: 98.4,115.2 98.4,116.6
  Top Layer w1: J2.2 97.288,107.088 98.688,107.088 100.4,108.8 100.4,113.2 98.4,115.2
  Bottom Layer w0.5: 84.9,111.3 U2.3 ; R5.1 93.775,114.025 93.8,114
  Bottom Layer w0.8: 84.9,110.9 84.9,111.3 ; 93.8,113.6 93.8,114
  Bottom Layer w1: C7.2 60,81.3 63.4,77.9 84.485,77.9 T1.1 84.3,88.855 84.3,99.9 87.924,103.524 87.924,107.174 C6.2 ; 84.9,110.9 84.9,110.3 84.1,109.5 82.481,109.5 82.25,109.269 C5.2 82.25,109 84,107.25 C6.2 ; 93.8,113.6 92.2,112 ; J2.2 97.1,107.075 94.275,109.9 93,109.9 92.2,110.7 92.2,112 ; C6.2 88,111.414 88.586,112 92.2,112
L: F1.1 J1.3 | length 10
  Bottom Layer w1: J1.3 32.6,112.44 32.6,117.448 33.477,118.325 35.765,118.325 36.245,118.805 F1.1
N: C1.1 J1.2 L1.4 R1.1 | length 27.8
  Bottom Layer w1: J1.2 C1.1 ; L1.4 37.25,106.25 C1.1 ; R1.1 38.025,112.475 C1.1
NetC1_2: C1.2 F1.2 L1.1 R1.2 | length 39.4
  Bottom Layer w1: R1.2@41.155,115.62 F1.2 ; R1.2@41.25,115.6 41.25,113.75 45.25,109.75 C1.2 50.8,104.8 47.9,104.8 44.75,101.65 L1.1
NetC2_1: C2.1 D1.1 D2.2 L1.2 | length 78
  Bottom Layer w0.8: C2.1 44.75,81 L1.2 39.9,92.5 32.4,92.5 29.3,95.6 29.3,118.7 33.3,122.7 49,122.7 50.002,121.698 D2.2 D1.1
NetC2_2: C2.2 D3.1 D4.2 L1.3 | length 47.5
  Top Layer w0.5: v1(47.8,107.3) 47.8,112.741 48.7,113.641 v1(48.7,113.8)
  Top Layer w0.8: v1(37.275,90.575) 37.287,90.587 37.287,94.188 v1(37.3,94.2)
  Bottom Layer w0.5: v1(37.3,94.2) 41.4,98.3 41.4,104.7 44,107.3 v1(47.8,107.3) ; v1(48.7,113.8) 49.827,114.927 49.827,115.81 D4.2
  Bottom Layer w0.8: C2.2 37.25,82 L1.3 37.275,87.675 v1(37.275,90.575) ; D4.2@50.019,116.002 50.3,116.002 53.522,116.002 D3.1
NetC3_1: C3.1 D1.2 D3.2 T1.8 U1.8 | length 70.8
  Top Layer w0.8: v1(54.9,101) 56,102.1 58.05,102.1 63.25,107.3 v1(63.3,107.3) 65.465,109.465 65.465,111.635 v1(65.4,111.7)
  Bottom Layer w0.8: v1(54.9,101) 54.9,98.2 57,96.1 59.8,96.1 63.2,92.7 63.2,87.3 66.3,84.2 73.715,84.2 T1.8 ; D1.2 D3.2 63.681,116.019 67.7,112 C3.1 67.477,110.392 67.423,110.446 66.053,110.446 65.49,111.009 65.49,111.61 v1(65.4,111.7) ; U1.8 v1(63.3,107.3)
NetC4_1: C4.1 U1.6 | length 5.3
  Bottom Layer w0.5: C4.1@59.88,106.32 60.3,105.9 61.1,105.9 61.7,105.3 61.7,104.1 62.311,103.489 63.271,103.489 U1.6
NetD5_1: D5.1 R3.1 | length 4.4
  Bottom Layer w0.5: D5.1 80.744,116.97 81.274,117.5 R3.1
NetD5_2: D5.2 U2.1 | length 3.9
  Bottom Layer w0.5: D5.2 80.32,114.6 U2.1
NetD6_1: D6.1 T1.4 | length 5.7
  Bottom Layer w0.8: T1.4 89.87,94.918 90.5,95.548 D6.1
NetD7_1: D7.1 R6.1 | length 4.7
  Top Layer w0.5: D7.1 96.9,117.85 96.9,119 97.253,119.353 98.053,119.353 v2(98.2,119.5)
  Bottom Layer w0.5: R6.1 96.65,120.3 97.303,119.647 98.053,119.647 v2(98.2,119.5)
NetQ1_1: Q1.1 U1.5 | length 4.8
  Bottom Layer w0.5: U1.5 63.77,102.19 65.615,100.345 65.615,99.375 Q1.1
NetQ1_4: Q1.4 T1.5 | length 7.2
  Bottom Layer w1: Q1.4 70.74,94.715 T1.5
NetR4_1: R4.1 R5.2 U2.2 | length 9.8
  Bottom Layer w0.5: U2.2 87,114.6 87.1,114.7 ; 91.1,115.1 R5.2
  Bottom Layer w0.8: 87.1,114.7 89.35,116.95 90.2,116.95 90.3,117.05 R4.1 90.3,115.9 91.1,115.1
pads on no net: J1.1 T1.2 T1.3 T1.6 T1.7 U1.1 U1.7

## Silkscreen, mask and mechanical layers (free items; w line width, h text height)
Top Overlay:
  text "WARNING ! HIGH VOLTAGE" at 32.189,117.54 h3
  text "L" at 27.65,112.55 h0.8 r270
  text "N" at 27.65,109.95 h0.8 r270
  text "NC" at 27.65,107.55 h0.8 r270
  text "SMPS Mains → 6.5V Flyback" at 50.82,72.755 h4 r0.21
Mechanical 1:
  lines w0.2: 26,73.27 ccw(c27.27,73.27) 27.27,72 100.5,72 100.73,72 ccw(c100.73,73.27) 102,73.27 102,122.4 ccw(c100.9,122.4) 100.9,123.5 27,123.5 ccw(c27,122.5) 26,122.5 26,73.27

## Text inside footprints (layer, text, board x,y; h text height)
C3: Top Overlay "+" at 67.4,111.792 h2
C5: Top Overlay "+" at 78.75,110.5 h2
C6: Top Overlay "+" at 91.2,106.6 h2
U1: Mechanical 13 "*" at 67.897,105.2 h1.27; Bottom Overlay "*" at 69.282,106.432 h1.27